# Altium PCB MIC17.PcbDoc
Units mil, origin at the board's own origin, x right, y up, seen from the top; angles counter-clockwise.
Board outline 3759.84 x 3838.58 mil, 2 copper layers (Top Layer, Bottom Layer); 46 components, 39 nets, 172 pads, 30 vias.
Unrouted connection lines stored in the file: 1.
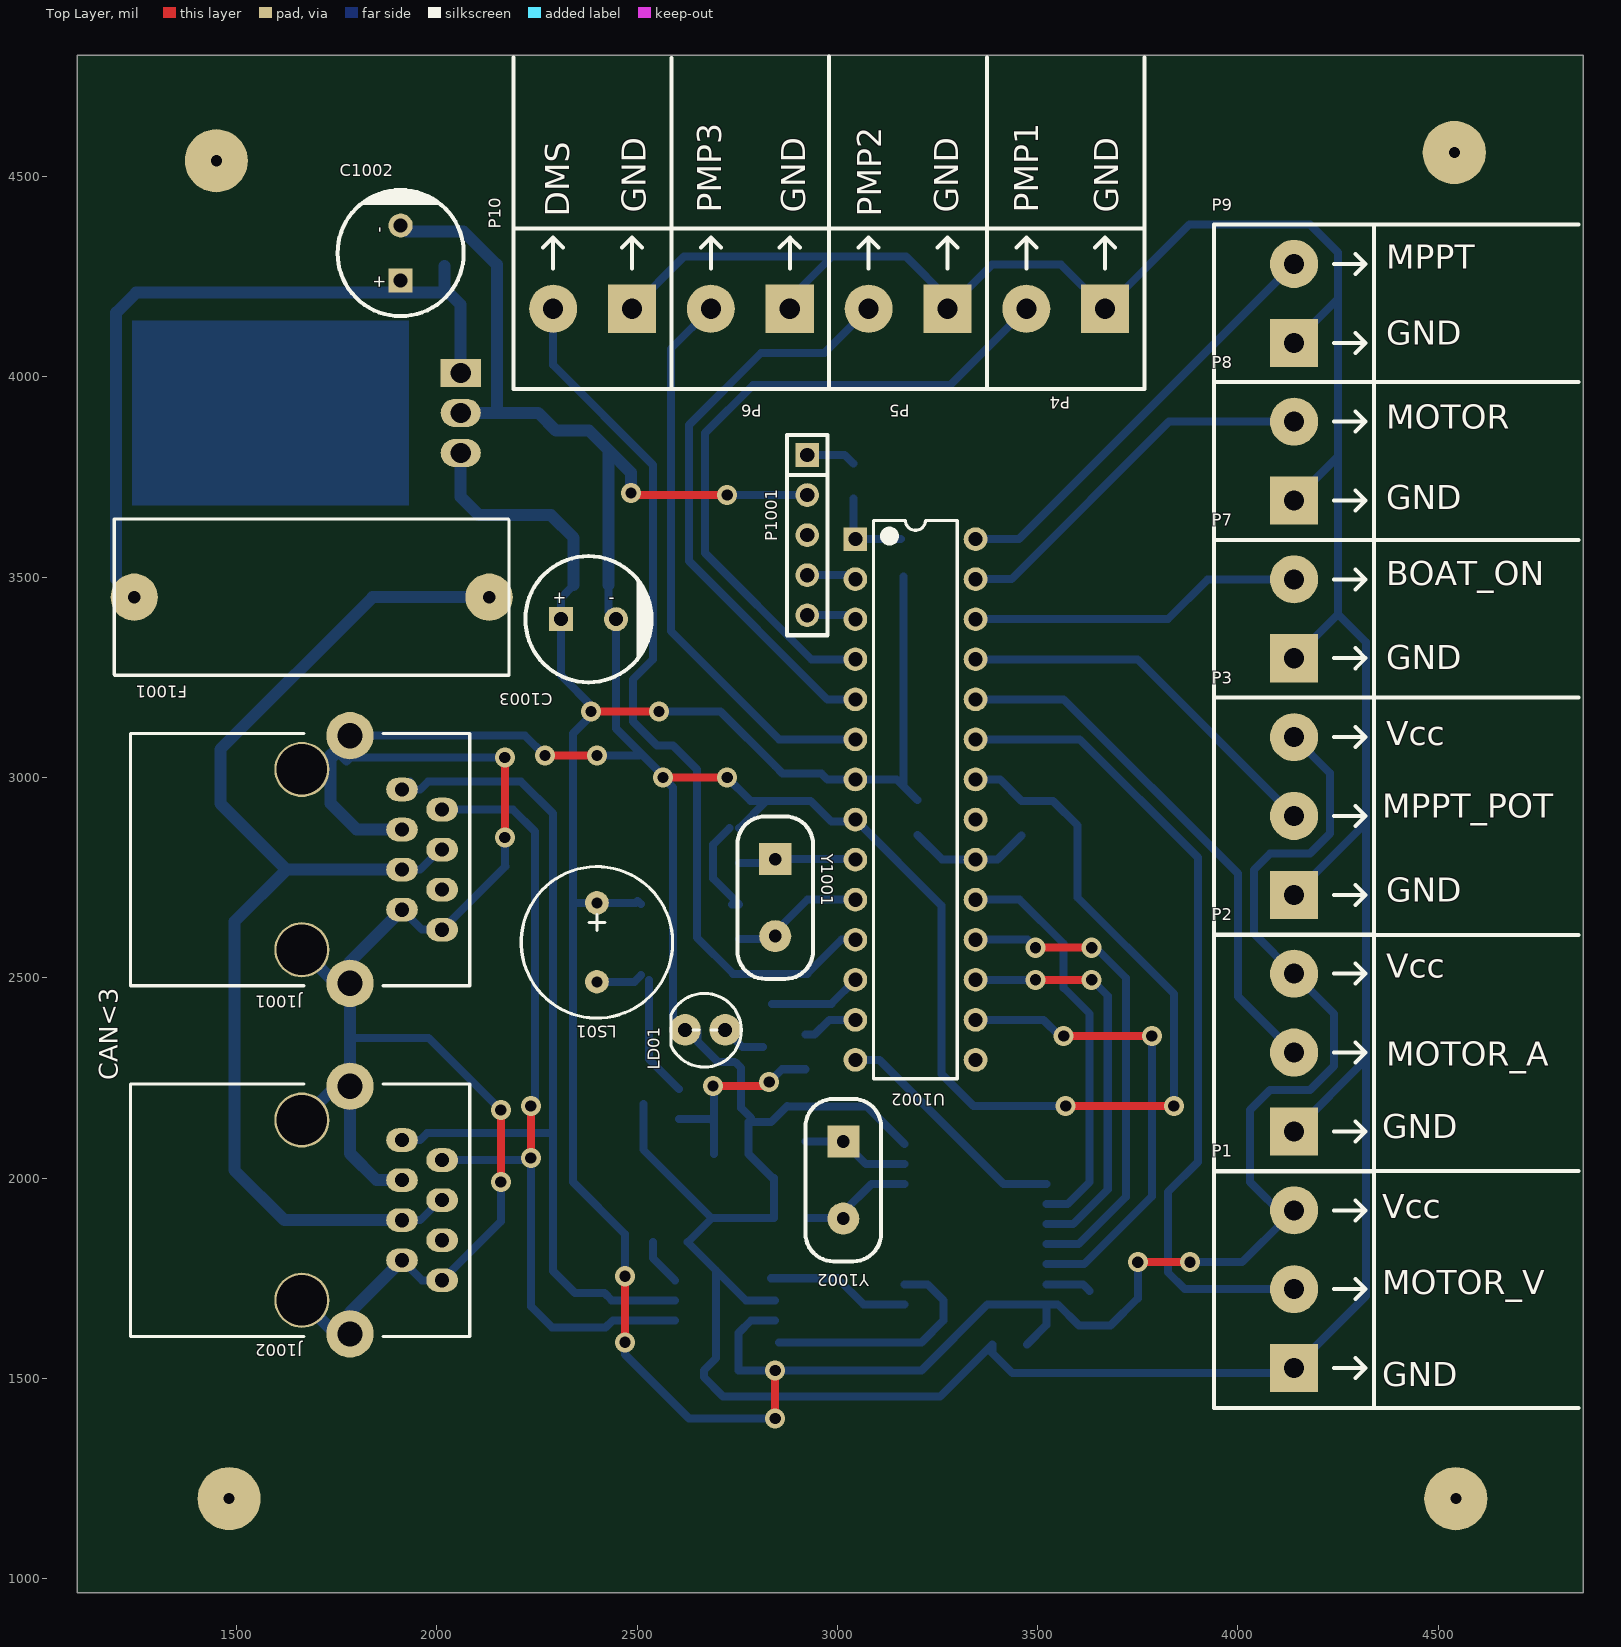
[diagram p0: Top Layer view]
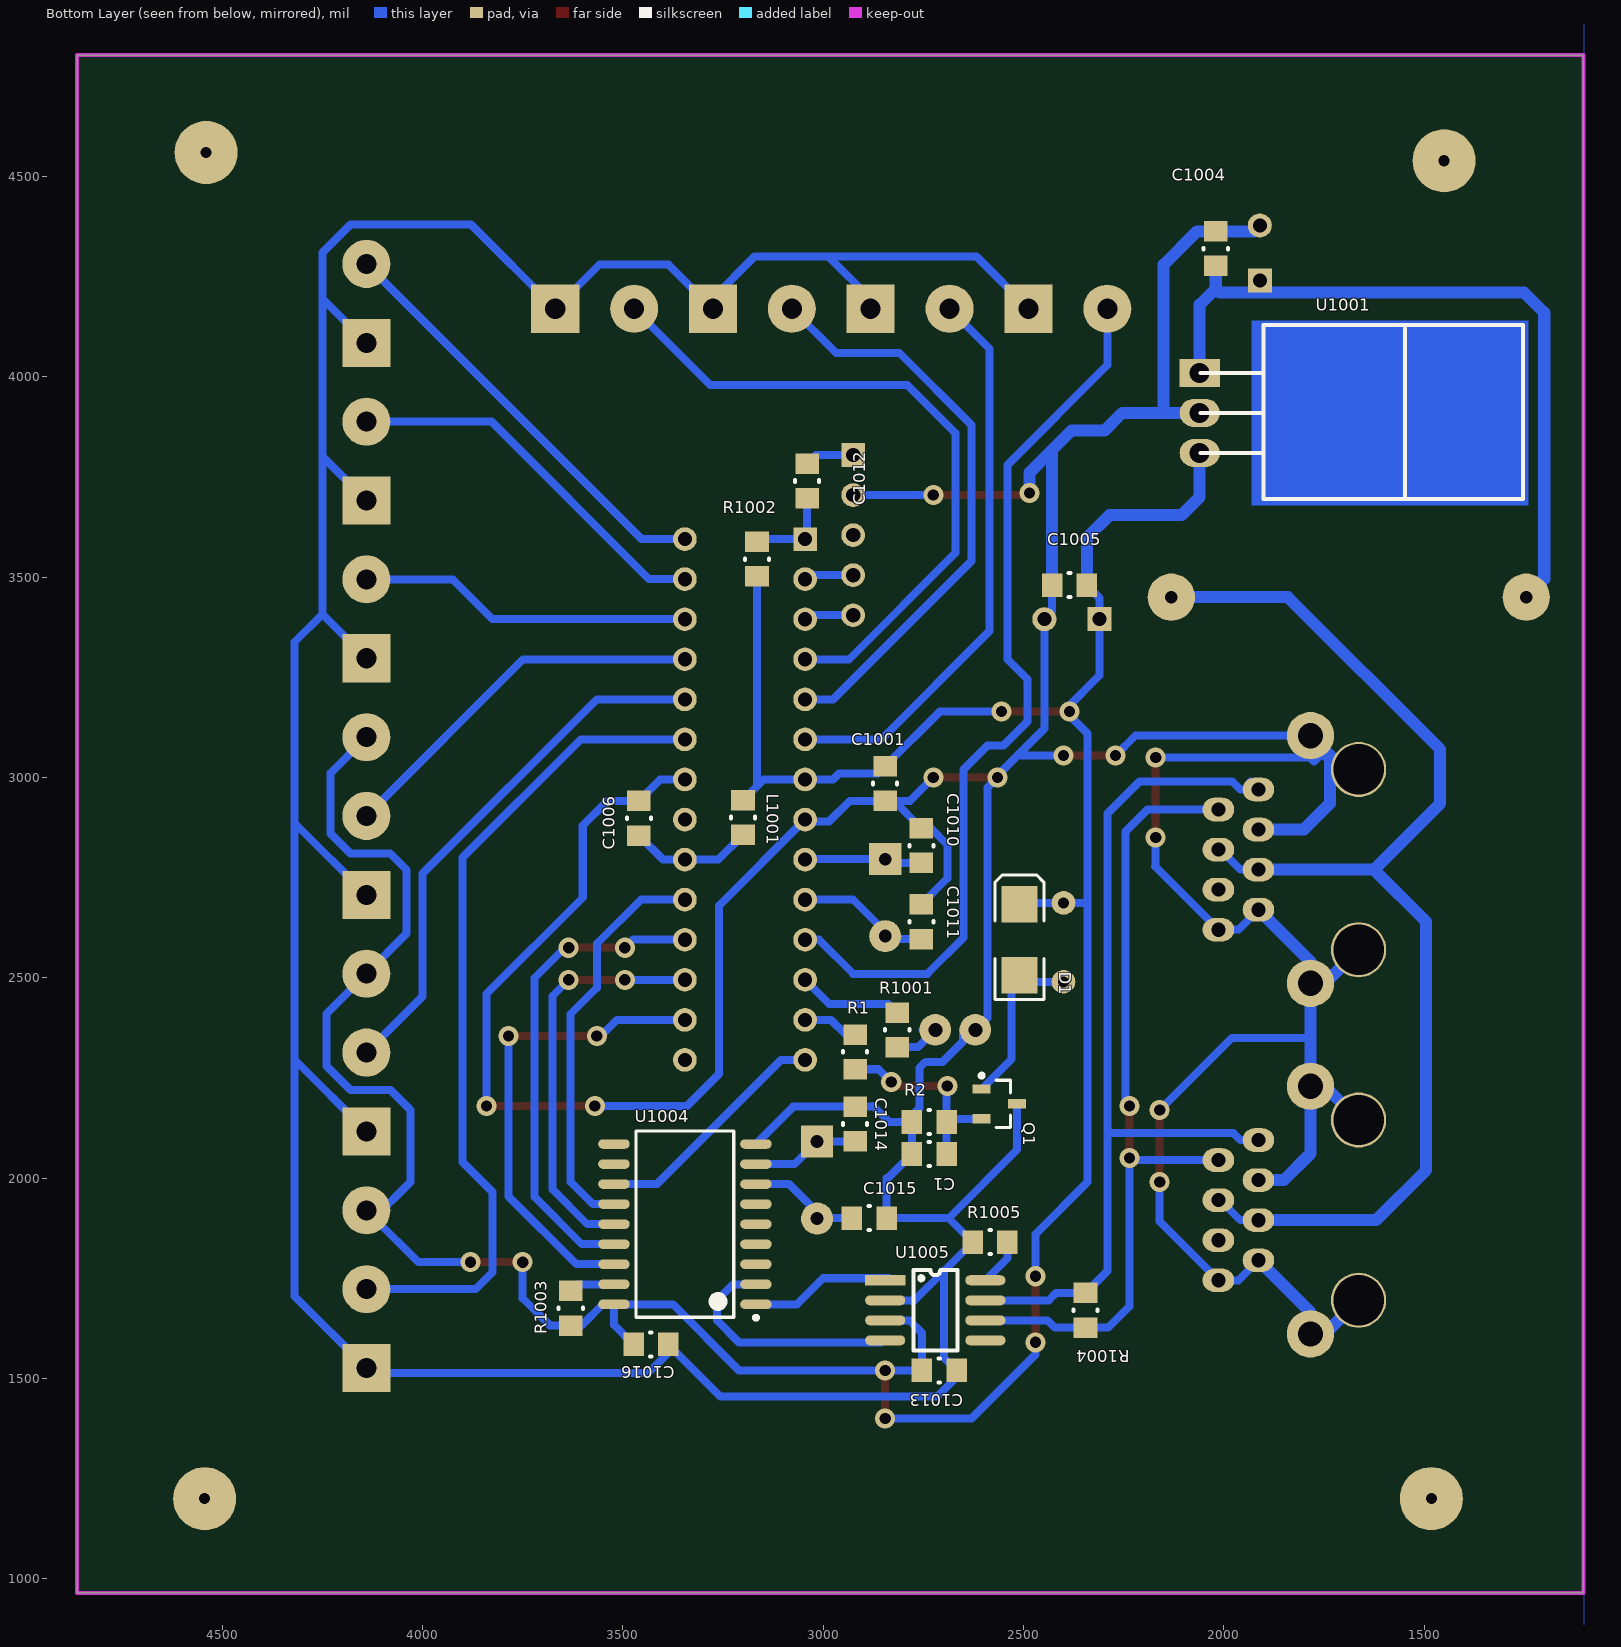
[diagram p1: Bottom Layer view, seen from below]
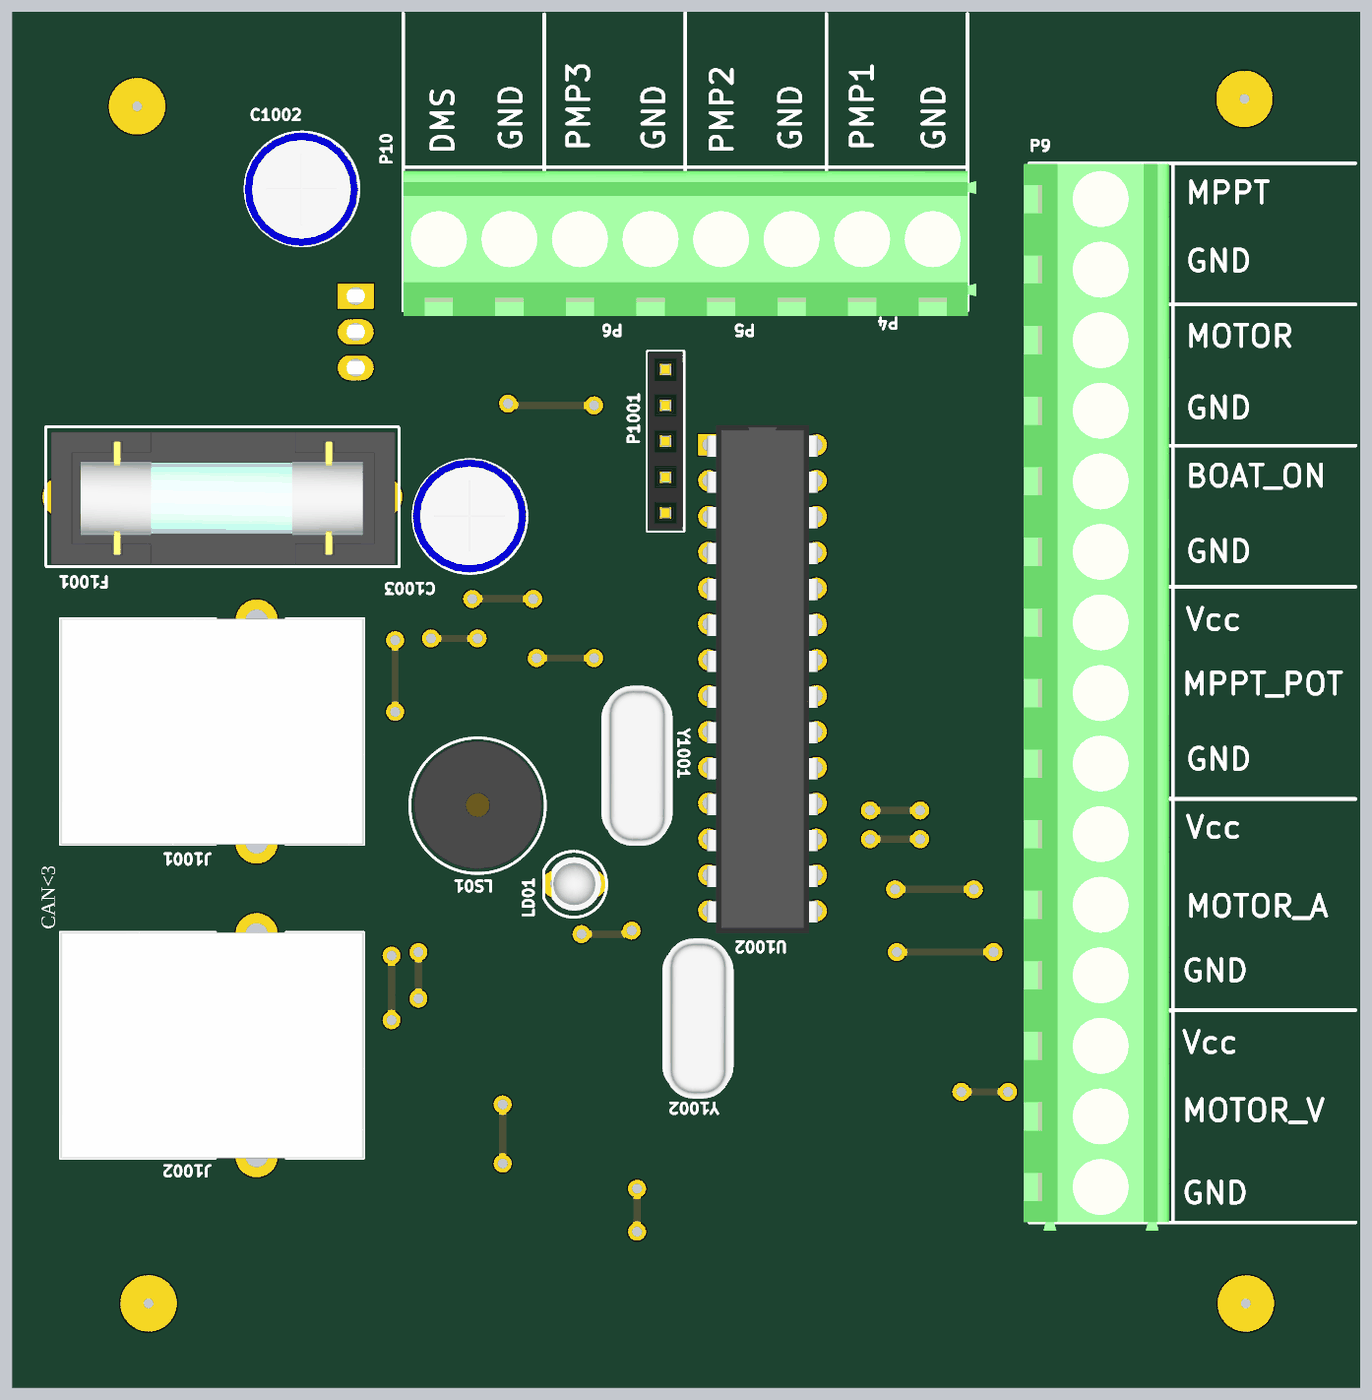
[diagram p2: 3D render of the assembled board from above, using the file's embedded part models]
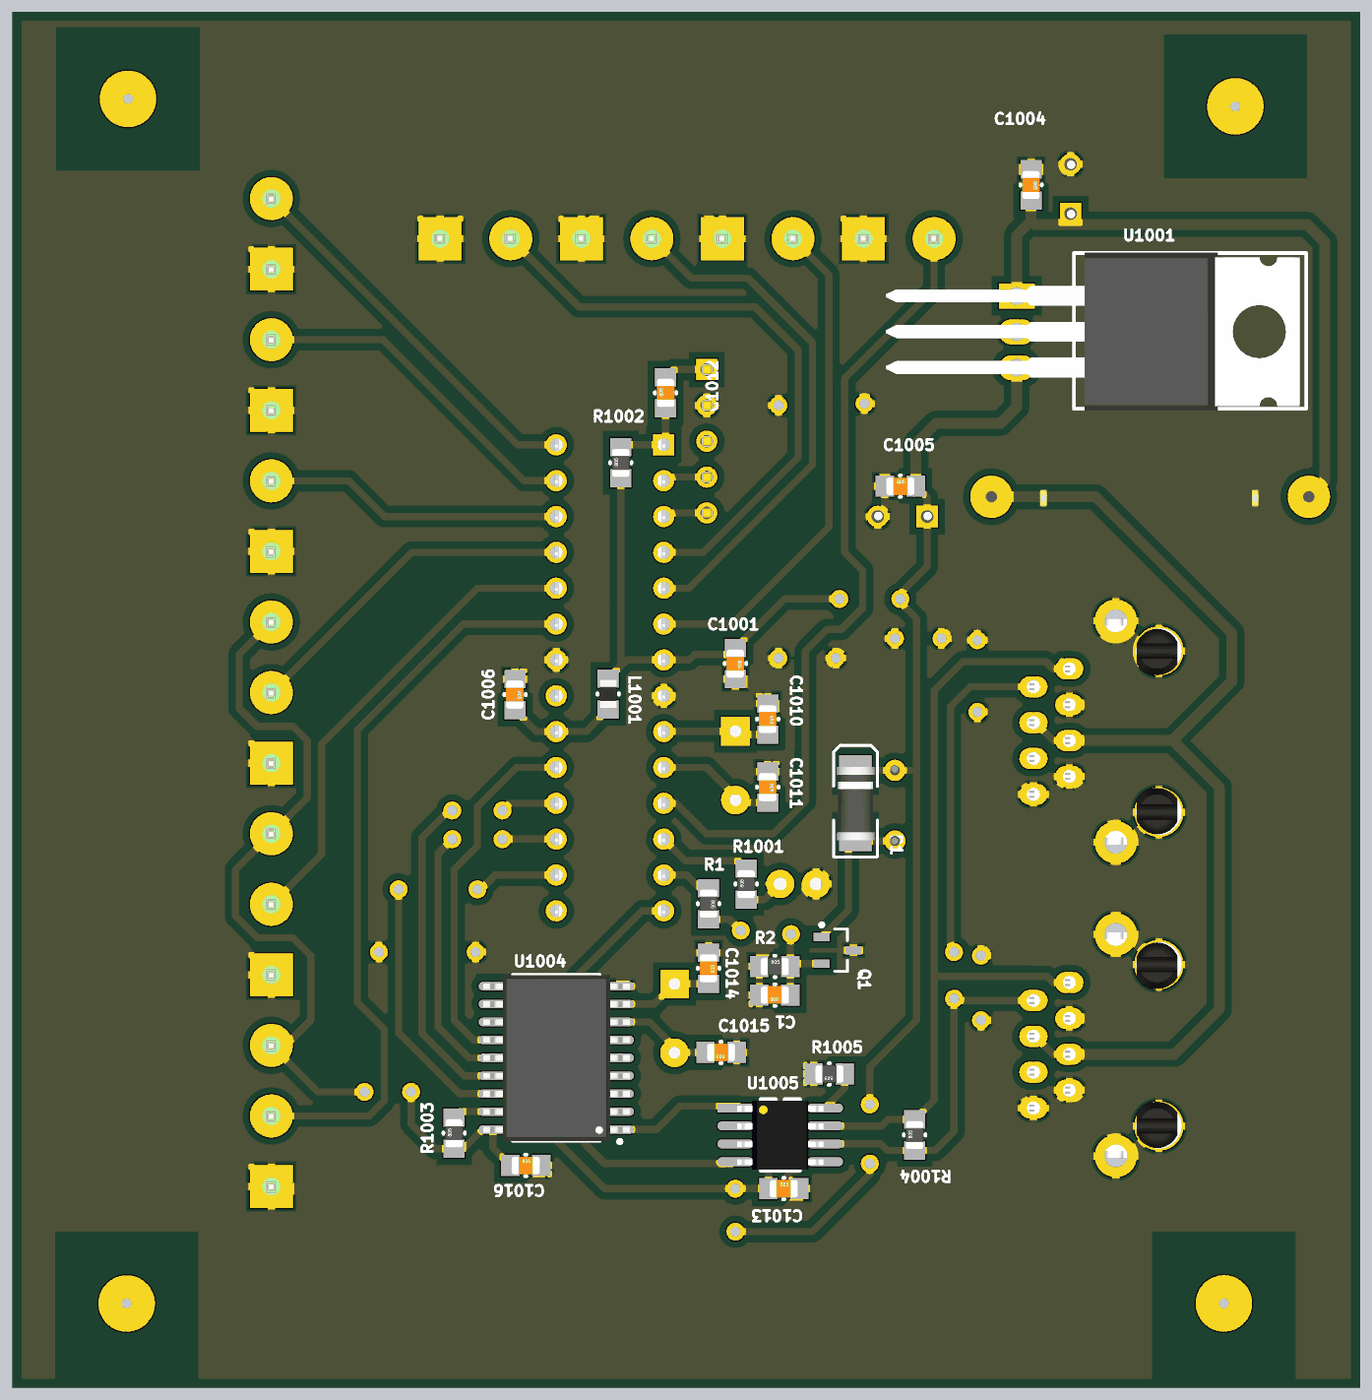
[diagram p3: 3D render of the assembled board from below, using the file's embedded part models]

## Layer stack, top to bottom
Top Layer: signal copper 1.4
Dielectric: dielectric 12.6, FR-4, Dk 4.8
Bottom Layer: signal copper 1.4

## Board outline
1102.36,964.57 4862.2,964.57 4862.2,4803.15 1102.36,4803.15

## Design rules (kind name [scope] priority, off if disabled: settings)
Clearance [All] p1: gap=20
PlaneClearance [All] p1: clearance=30
PlaneConnect [All] p1: planeconnectstyle=Relief reliefexpansion=20 reliefentries=4 reliefconductorwidth=20 reliefairgap=10
PolygonConnect [All] p1: connectstyle=Relief reliefconductorwidth=20 reliefentries=4 polygonreliefangle="90 Angle"
RoutingVias [All] p1: holewidth=28 width=50 viastyle="Through Hole" minholewidth=28 minwidth=50 maxholewidth=28 maxwidth=50
SilkscreenOverComponentPads [IsPad] p1: minsilkscreentomaskgap=10
SolderMaskExpansion [All] p1: expansion=4
Width [All] p1: maxlimit=30 minlimit=15 preferedwidth=20
25 further rules are at their usual default settings.

## Components (designator, comment, footprint, x,y, rotation, side; value= is the part's Value field where it differs from the comment)
C1 "100nF" 0805C 2735,2060 r180 bottom
C1001 "100nF" 0805C 2845,2985 r90 bottom
C1002 "CapacitorPol" CP3.5mm-8.0mm 1910,4240 r270 top
C1003 "CapacitorPol" CP3.5mm-8.0mm 2310,3395 r180 top
C1004 "100nF" 0805C 2020,4320 r90 bottom
C1005 "100nF" 0805C 2385,3480 r0 bottom
C1006 "100nF" 0805C 3460,2898.31 r90 bottom
C1010 "22pF" 0805C 2755,2830 r90 bottom
C1011 "22pF" 0805C 2755,2640 r90 bottom
C1012 "100nF" 0805C 3040,3740 r270 bottom
C1013 "100nF" 0805C 2710,1520 r0 bottom
C1014 "22pF" 0805C 2920,2135 r90 bottom
C1015 "22pF" 0805C 2885,1900 r180 bottom
C1016 "100nF" 0805C 3430,1585 r0 bottom
D1 "BYD77" DSO-C2/X2.3 2510,2595 r90 bottom
F1001 "250mA" "PORTA FUSIVEL" 1245,3450 r0 top
J1001 "RJ45 (canbus)" "ASSMANN A-2004-2-4-LP/FS" 1665,2795 r270 top
J1002 "RJ45 (canbus)" "ASSMANN A-2004-2-4-LP/FS" 1665,1920 r270 top
L1001 "?H" 0805L 3200,2900 r270 bottom
LD01 "GREEN" LED3MM 2720,2370 r180 top (schematic designator LD1001)
LS01 "Bell" Buzzer5V 2400,2490 r90 top (schematic designator LS?)
P1 "Motor Vel" KRE_3 4140,1525.94 r90 top
P2 "Motor Acel" KRE_3 4140,2116.5 r90 top
P3 "MPPT Pwr" KRE_3 4140,2707.05 r90 top
P4 "Pump 1" KRE_2 3668.66,4170 r180 top
P5 "Pump 2" KRE_2 3274.96,4170 r180 top
P6 "Pump 3" KRE_2 2881.26,4170 r180 top
P7 "Boat On" KRE_2 4140,3297.6 r90 top
P8 "M. On" KRE_2 4140,3691.3 r90 top
P9 "MPPT On" KRE_2 4140,4085 r90 top
P10 "DMS" KRE_2 2487.56,4170 r180 top
P1001 "USART" HDR1X5 2925,3805 r270 top
Q1 "BCV27" SOT95P240-3N 2560,2185 r180 bottom
R1 "100R" 0805R 2920,2315 r90 bottom
R2 "470" 0805R 2735,2140 r0 bottom
R1001 "470" 0805R 2815,2370 r270 bottom
R1002 "10k" 0805R 3165,3545 r270 bottom
R1003 "10k" 0805R 3630,1675 r270 bottom
R1004 "120" 0805R 2345,1670 r270 bottom
R1005 "10k" 0805R 2583.31,1840 r180 bottom
U1001 "LM7805" TO220_DEITADO 1902.52,3910 r270 bottom
U1002 "ATmega328P" DIP28-300(100) 3045,3595 r270 top
U1004 "MCP2515-E/SO" WSO18_L 3345,1885 r0 bottom
U1005 "MCP2551-I/SN" SOIC08-150(50) 2845,1745 r90 bottom
Y1001 "16MHz" HC49-US-THT 2845,2700 r270 top
Y1002 "16MHz" HC49-US-THT 3015,1995 r270 top

## Footprints (in the part's own frame and the unit in brackets; to place one, negate y for a bottom-side part, rotate by r counter-clockwise, add the part's x,y. Pads: shape width x height; smd on the part's side, far side on the other; paste and mask are expansions set on the pad)
0805C [mm] "Chip Capacitor; Body 2 x 1.3 mm (LxW typ)"
  rect 1.3x1.5 smd: 1(1.1,0) 2(-1.1,0)
  silkscreen extent -0.05,-0.76 0.05,0.76, body extent -1,-0.62 1,0.64, height 0.78
0805L [mm] "Chip Inductor; Body 2 x 1.3 mm (LxW typ)"
  rect 1.3x1.5 smd: 1(1.1,0) 2(-1.1,0)
  silkscreen extent -0.05,-0.76 0.05,0.76, body extent -1,-0.59 1,0.61, height 0.95
0805R [mm] "Chip Resistor; Body 2 x 1.3 mm (LxW typ)"
  rect 1.3x1.5 smd: 1(1.1,0) 2(-1.1,0)
  silkscreen extent -0.05,-0.76 0.05,0.76, body extent -0.99,-0.63 1.01,0.63, height 0.8
"ASSMANN A-2004-2-4-LP/FS" [mm]
  oval 1.5x2 hole 0.9: 1(-4.445,6.31) 2(-3.175,8.85) 3(-1.905,6.31) 4(-0.635,8.85) 5(0.635,6.31) 6(1.905,8.85) 7(3.175,6.31) 8(4.445,8.85)
  round 3 hole 1.6: S(-7.855,3.01) S(7.845,3.01)
  round 3.5 hole 3.2: S(-5.715,-0.04) S(5.715,-0.04)
  silkscreen extent -8,-10.9 8,10.6, body extent -8,-10.9 8,10.6, height 13.6
Buzzer5V [mm]
  round 1.5 hole 0.7: 1(0,0) 2(5,0)
  silkscreen extent -2.3,-4.8 7.3,4.8, body extent -2.01,-4.57 7.09,4.53, height 5.6
CP3.5mm-8.0mm [mil] "Capacitor, Electrolytic, Radial; Body 8 x 10.5 mm (Dia.xH typ); Pin Spacing 3.5 mm (typ)"
  rect 60x60 hole 35: 1(0,0)
  round 60 hole 35: 2(-137.8,0)
  silkscreen extent -226,-157 89,157, body extent -226,-160 91,157, height 468
DIP28-300(100) [mm] "DIP, 28-Leads, Row Spacing 7.62mm, Pitch 2.54mm, Body 34.67x7.3mm"
  rect 1.5x1.5 hole 0.9: 1(0,0)
  round 1.5 hole 0.9: 2(2.54,0) 3(5.08,0) 4(7.62,0) 5(10.16,0) 6(12.7,0) 7(15.24,0) 8(17.78,0) 9(20.32,0) 10(22.86,0) 11(25.4,0) 12(27.94,0) 13(30.48,0) 14(33.02,0) 15(33.02,7.62) 16(30.48,7.62) 17(27.94,7.62) 18(25.4,7.62) 19(22.86,7.62) 20(20.32,7.62) 21(17.78,7.62) 22(15.24,7.62) 23(12.7,7.62) 24(10.16,7.62) 25(7.62,7.62) 26(5.08,7.62) 27(2.54,7.62) 28(0,7.62)
  silkscreen extent -1.19,1.16 34.21,6.46, body extent -1.4,-0.13 34.6,7.74, height 5.08
DSO-C2/X2.3 [mm] "DO-214-AA/SMB; 2 C-Bend Leads; Body 5.3 x 3.6 mm, inc. leads (LxW)"
  rect 2.3x2.3 smd: 1(-2.25,0) 2(2.25,0)
  silkscreen extent -3.8,-1.55 4.1,1.55, body extent -2.62,-1.35 2.58,1.32, height 2.64
HC49-US-THT [mil] "THT Quartz Crystal"
  rect 80x80 hole 32: 1(-96.06,0)
  round 80 hole 32: 2(96.06,0)
  silkscreen extent -203,-94 203,94, body extent -223,-91 224,92, height 138
HDR1X5 [mm] "Connector; Header; 5 Position"
  rect 1.5x1.5 hole 0.9: 1(0,0)
  round 1.5 hole 0.9: 2(2.54,0) 3(5.08,0) 4(7.62,0) 5(10.16,0)
  silkscreen extent -1.27,-1.27 11.43,1.27, body extent -1.27,-1.27 11.43,1.23, height 8.4
KRE_2 [mil] "Terminal Block 2 pins"
  rect 120x120 hole 50: 1(0,0)
  round 120 hole 50: 2(196.85,0)
  silkscreen extent -98,-200 295,200, body extent -123,-190 294,216, height 559
KRE_3 [mil] "Terminal Block 3 pins"
  rect 120x120 hole 50: 1(0,0)
  round 120 hole 50: 2(196.85,0) 3(393.7,0)
  silkscreen extent -100,-200 492,200, body extent -123,-190 491,216, height 559
LED3MM [mm]
  round 2 hole 0.889: 1(0,0) 2(2.54,0)
  silkscreen extent -1.03,-2.31 3.43,2.36, body extent -0.63,-1.9 2.87,1.9, height 5.5
"PORTA FUSIVEL" [mm]
  round 3 hole 0.8: 1(0,0) 2(22.5,0)
  silkscreen extent -1.27,-4.95 23.77,4.95, body extent -0.9,-4.8 23.5,4.6, height 12.6
SOIC08-150(50) [mil] "SOIC; 8 Leads; Row Spacing 3.81 mm; Pitch 1.27 mm; 3D Antonio Fagaldo"
  rect 25x100 smd: 1(0,0)
  oval 25x100 smd: 2(-50,0) 3(-100,0) 4(-150,0) 5(-150,-250) 6(-100,-250) 7(-50,-250) 8(0,-250)
  silkscreen extent -175,-180 25,-70, body extent -173,-246 20,-4, height 69
SOT95P240-3N [mm] "SOT23, 3-Leads, Body 2.9x1.3mm, Pitch 0.95mm, Lead Span 2.4mm, IPC Medium Density"
  rect 1.15x0.6 smd: 1(-1.125,0.95) 2(-1.125,-0.95) 3(1.125,0)
  silkscreen extent -1.25,-1.5 0.7,1.92, body extent -0.7,-1.5 0.7,1.5, height 1.14
TO220_DEITADO [mil]
  rect 70x100 hole 50: 1(-100,-157.48)
  oval 70x100 hole 50: 2(0,-157.48) 3(100,-157.48)
  silkscreen extent -220,-155 214,650, body extent -221,-522 220,632, height 185
WSO18_L [mm] "18-Pin Small Outline Integrated Circuit 1.27 mm Pitch, IPC High Density"
  oval 2x0.6 smd: 1(-4.5,5.08) 2(-4.5,3.81) 3(-4.5,2.54) 4(-4.5,1.27) 5(-4.5,0) 6(-4.5,-1.27) 7(-4.5,-2.54) 8(-4.5,-3.81) 9(-4.5,-5.08) 10(4.5,-5.08) 11(4.5,-3.81) 12(4.5,-2.54) 13(4.5,-1.27) 14(4.5,0) 15(4.5,1.27) 16(4.5,2.54) 17(4.5,3.81) 18(4.5,5.08)
  silkscreen extent -4.62,-5.9 3.1,6.05, body extent -5.21,-5.87 5.19,5.88, height 2.82

## Part data
C1 C1001 C1004 C1005 C1006 C1010 C1011 C1012 C1013 C1014 C1015 C1016: library part Cap_0805, "Capacitor"
C1002 C1003: "Solid Aluminum Capacitor with Organic Semiconductor Electrolyte: 100uF, 10V, Bulk Pack"
D1: library part Diode, "Default Diode"
F1001: library part "Fuse 1", "Fuse"
J1001 J1002: library part "Modular Jack with Shield", "YH-59-01"
L1001: library part Ind_0805, "Inductor"
LD01: library part LED_0805, "LED"
LS01: "Electrical Bell"
P1 P2 P3: library part "Header 3", "Header, 3-Pin"
P4 P5 P6 P7 P8 P9 P10: library part KRE_2, "Terminal Block 1x2"
P1001: library part "Header 5", "Header, 5-Pin"
Q1: library part NPN1, "NPN Darlington Bipolar Transistor"
R1 R2 R1001 R1002 R1003 R1004 R1005: library part Res_0805, "Resistor"
U1001: library part µA7805CKC, "Positive-Voltage Regulator"
U1002: "8-bit AVR Microcontroller, 32KB Flash, 1KB EEPROM, 2KB SRAM, 28-pin PDIP, Industrial Grade (-40°C to 85°C)"
U1004: library part CMP-0186-00035-2, "Stand-Alone CAN Controller With SPI Interface, 18-Pin SOIC, Extended Temperature"
U1005: library part CMP-1721-00003-1, "High-Speed CAN Transceiver, / 1 Mb/s, 4.5 to 5.5 V, 8-Pin SOIC (SN), Industrial Temperature, RoHS, Tube"
Y1001 Y1002: library part Crystal, "Crystal"

## Free pads (board coordinates)
  round 157.48 hole 27.56: 0(1450,4539.37) 0(1481.89,1200) 0(4540,4560) 0(4543.7,1199.68)

## Via types
v1: diameter 50, hole 28, Top Layer to Bottom Layer, 30 vias

## Nets (pads, with @x,y where several pads share a name; then routed paths per layer and width w, separated by ;. In a path a pad name is that pad's centre, name@x,y a point inside that pad or via, vN(x,y) a via of type N, cw(c..) or ccw(c..) an arc to the next point about the centre after c; other vN are vias at no path point)
+5V: C1001.1 C1003.1 C1005.2 C1013.1 C1016.1 D1.2 L1001.2 LS01.2 P1.3 P2.3 P3.3 R1002.1 R1003.1 U1001.3 U1002.7 U1004.18 U1005.3 | length 8400.9
  Top Layer w20: v1(2385,3165) v1(2555,3165) ; v1(2470,1590) v1(2470,1755) ; v1(2845,1400) v1(2845,1520) ; v1(3750,1790) v1(3880,1790)
  Bottom Layer w20: C1005.2 2310,3448.31 C1003.1 2310,3255 2392.5,3172.5 2392.5,3167.5 2390,3165 v1(2385,3165) 2385,3155 2340,3110 2340,1990 2470,1860 v1(2470,1755) ; 2346.85,2686.85 LS01.2 ; LS01.2@2415,2686.85 2496.73,2686.85 2501.73,2691.85 D1.2 ; v1(2470,1590) 2470,1560 2630,1400 v1(2845,1400) ; v1(2555,3165) 2708.31,3165 C1001.1 2863.31,3010 2960,3010 2975,2995 U1002.7 3148.31,2995 L1001.2 3165,2978.31 R1002.1 ; U1005.3 2785,1645 2753.31,1613.31 C1013.1 v1(2845,1520) 3210,1520 3375,1685 U1004.18 ; C1016.1 3522.17,1633.86 U1004.18 ; v1(3750,1790) 3750,1700 3681.69,1631.69 R1003.1 3603.31,1631.69 3550,1685 U1004.18 ; v1(3880,1790) 4010.35,1790 P1.3@4120.35,1900 ; P1.3 P1.3@4120.35,1900 ; P3.3 4230,3010.75 4230,2860 4180,2810 4080.53,2810 4040,2769.47 4040,2610.2 P2.3 4240,2410.2 4240,2280 4180,2220 4080,2220 4030,2170 4030,1990.35 P1.3@4120.35,1900
  Bottom Layer w30: U1001.3 2060,3700 2105,3655 2285,3655 2341.69,3598.31 C1005.2
+5V_ADC: C1006.2 L1001.1 U1002.20 | length 310.4
  Bottom Layer w20: L1001.1 3261.69,2795 U1002.20 3400,2795 C1006.2
+18V: C1002.1 C1004.2 F1001.1 U1001.1 | length 1842.6
  Bottom Layer w30: F1001.1 1200,3495 1200,4160 1250,4210 2010,4210 ; C1004.2 2020,4220 2060,4180 U1001.1
+18V_PRE: F1001.2 J1001.4 J1001.5 J1002.4 J1002.5 | length 2999.6
  Bottom Layer w20: J1002.5 1958.79,1895 2008.79,1945 J1002.4 ; J1001.5 1958.79,2770 2008.79,2820 J1001.4
  Bottom Layer w30: J1002.5 1620,1895 1495,2020 1495,2640 1625,2770 ; J1001.5 1625,2770 ; F1001.2@2130,3450 1840,3450 1460,3070 1460,2935 1625,2770
BOAT_ON: P7.2 U1002.26 | length 836.2
  Bottom Layer w20: U1002.26 3825,3395 3924.45,3494.45 P7.2
BUZZER: R1.1 U1002.13 | length 140.2
  Bottom Layer w20: R1.1 2943.31,2358.31 2980,2395 U1002.13
CAN_GND: C1.2 C1001.2 C1002.2 C1003.2 C1004.1 C1005.1 C1006.1 C1010.1 C1011.1 C1013.2 C1014.1 C1015.1 C1016.2 J1001.3 J1001.7 J1001.8 J1001.S J1002.3 J1002.7 J1002.8 J1002.S LD01.2 P1.1 P2.1 P3.1 P4.1 P5.1 P6.1 P7.1 P8.1 P9.1 P10.1 P1001.2 Q1.3 R2.1 R1005.2 U1001.2 U1002.8 U1002.22 U1004.9 U1005.2 | length 21191.4
  Top Layer w20: v1(2160,1990) v1(2160,2170) ; v1(2170,2850) v1(2170,3050) ; v1(2270,3055) v1(2400,3055) ; v1(2485,3710) 2490,3705 v1(2725,3705) ; v1(2565,3000) v1(2725,3000) ; v1(3570,2180) v1(3840,2180)
  Bottom Layer w20: 1735.11,3040 1755.11,3060 1775.11,3040 1785.11,3050 v1(2170,3050) ; 1783.5,2350 1980,2350 v1(2160,2170) ; J1001.S@1783.5,3104.25 2220.75,3104.25 v1(2270,3055) ; J1002.7 1963.43,1745 J1002.8 2160,1891.57 v1(2160,1990) ; J1001.7 1963.43,2620 J1001.8 2171.71,2778.29 2170,2780 v1(2170,2850) ; v1(2400,3055) 2505,3055 2510,3060 ; C1005.1 2428.31,3414.49 C1003.2 2447.8,3122.2 2510,3060 ; P10.1 2617.56,4300 2981.26,4300 ; Q1.3 2515.71,2070.91 2686.61,1900 ; v1(2725,3000) 2783.31,2941.69 C1001.2@2823.39,2941.69 ; v1(2725,3705) P1001.2 ; C1010.1@2731.02,2873.31 2690,2832.28 2690,2748.31 C1011.1 C1011.1@2736.69,2683.31 ; C1010.1 C1001.2@2823.39,2941.69 ; R2.1@2785,2150 2760,2175 2760,2275 2748.31,2286.69 2746.74,2286.69 2743.43,2290 2701.9,2290 2650.63,2341.27 2650.63,2370 LD01.2 2590,2400 2590,2975 v1(2565,3000) 2565,3005 2510,3060 ; U1005.2 2771.61,1695 2697.72,1768.9 ; P6.1 2881.26,4195 2983.76,4297.5 2981.26,4300 ; U1004.9 3075,2177.83 3075,2178.31 C1014.1 2876.69,2178.31 2875,2180 2835,2140 R2.1 C1.2 2838.31,2000 2841.69,2000 C1015.1 2686.61,1900 ; U1002.22 3406.61,2995 C1006.1 3538.39,2941.61 3600,2880 3600,2700 3840,2460 v1(3840,2180) ; v1(3570,2180) 3340,2180 3260,2260 3260,2680 U1002.8 3040,2890 2985,2890 2933.31,2941.69 C1001.2 C1001.2@2823.39,2941.69 ; P2.1 4320,2296.5 ; P3.1 4320,2887.05 ; P7.1 4250,3407.6 ; P8.1 4250,3801.3 ; P9.1 4250,4195 ; 2686.61,1900 R1005.2 2697.72,1768.9 ; 2697.72,1768.9 2697.72,1551.02 C1013.2 2666.69,1503.31 2715,1455 3256.69,1455 C1016.2 3386.69,1563.31 3436.69,1513.31 4127.36,1513.31 P1.1 4320,1705.94 4320,2296.5 ; 2981.26,4300 3171.26,4300 3274.96,4196.3 P5.1 3276.26,4170 3386.26,4280 3558.66,4280 P4.1 3878.66,4380 4180,4380 4250,4310 4250,4195 ; 4250,3407.6 4250,3801.3 ; 4250,3407.6 4320,3337.6 4320,2887.05 ; 4250,3801.3 4250,4195 ; 4320,2296.5 4320,2887.05
  Bottom Layer w30: J1002.S@1663.43,1695 1747.28,1611.14 1783.5,1611.14 1783.5,1665.08 J1002.7 ; J1002.S@1663.43,2145 1747.68,2229.25 J1002.S@1783.5,2229.25 ; J1001.S@1663.43,2570 1747.28,2486.14 J1001.S@1783.5,2486.14 ; J1001.S@1783.5,3104.25 1735.11,3055.86 1735.11,3040 1735.11,2934.89 1800,2870 J1001.3 ; C1002.2 1924.49,4363.31 C1004.1 2066.69,4363.31 2150,4280 2150,3910 ; J1002.3 1850,1995 1783.5,2061.5 J1002.S@1783.5,2229.25 ; J1001.7 1783.5,2540.08 J1001.S@1783.5,2486.14 ; U1001.2 2150,3910 ; C1005.1 2428.31,3817.72 ; v1(2485,3710) 2485,3761.02 2428.31,3817.72 ; J1002.S@1783.5,2229.25 1783.5,2350 J1001.S@1783.5,2486.14 ; 2150,3910 2253.27,3910 2297.76,3865.51 2380.51,3865.51 2428.31,3817.72
CAN_H: J1001.1 J1002.1 R1004.2 U1005.7 | length 2307
  Bottom Layer w20: J1002.1 1958.79,2095 1975.82,2112.03 2024.53,2112.03 ; J1001.1@1933.43,2990 J1001.1 1958.79,2970 1978.79,2990 2210,2990 2290,2910 2290,1768.31 R1004.2 2418.48,1713.31 2436.79,1695 U1005.7 ; 2024.53,2112.5 2290,2112.5
CAN_L: J1001.2 J1002.2 R1004.1 U1005.6 | length 2055.6
  Top Layer w20: v1(2235,2050) v1(2235,2180)
  Bottom Layer w20: J1002.2 v1@2230,2045 ; J1001.2 2190,2920 2245,2865 2245,2180 v1(2235,2180) ; v1(2235,2050) 2235,1680 2288.31,1626.69 R1004.1 2421.69,1626.69 2440,1645 U1005.6
DMS: P10.2 U1002.11 | length 2251.2
  Bottom Layer w20: P10.2 2290.71,4029.29 2540,3780 2540,3295 2490,3245 2490,3140 2550,3080 2590,3080 2650,3020 2650,2600 2740,2510 2925,2510 3010,2595 U1002.11
LED: R1001.2 U1002.12 | length 233.2
  Bottom Layer w20: R1001.2@2836.69,2435 2985,2435 U1002.12
MCP2515_INT: U1002.14 U1004.12 | length 605.6
  Bottom Layer w20: U1002.14 3105,2295 3415,1985 U1004.12
MCP2515_MISO: U1002.18 U1004.15 | length 1208.2
  Top Layer w20: v1(3495,2575) v1(3635,2575)
  Bottom Layer w20: U1002.18 3475,2595 v1(3495,2575) ; U1004.15 3602.28,1835 3720,1952.72 3720,2500 3645,2575 v1(3635,2575)
MCP2515_MOSI: U1002.17 U1004.14 | length 1028.8
  Top Layer w20: v1(3495,2495) v1(3635,2495) v1@3645,2495
  Bottom Layer w20: U1002.17 v1(3495,2495) ; U1004.14 3588.64,1885 3675,1971.36 3675,2455 v1(3635,2495)
MCP2515_SCK: U1002.19 U1004.13 | length 1018.1
  Bottom Layer w20: U1002.19 3455,2695 3565,2585 3565,2475 3630,2410 3630,1990 3575,1935 U1004.13
MCP2515_SS: U1002.16 U1004.16 | length 1190.4
  Top Layer w20: v1(3565,2355) v1(3785,2355)
  Bottom Layer w20: U1002.16 3515,2395 3555,2355 v1(3565,2355) ; U1004.16 3615.92,1785 3785,1954.08 v1(3785,2355)
MOTOR_ACEL: P2.2 U1002.24 | length 1339.8
  Bottom Layer w20: U1002.24 3565,3195 4000,2760 4000,2453.35 P2.2
MOTOR_ON: P8.2 U1002.27 | length 957.8
  Bottom Layer w20: U1002.27 3435,3495 3828.15,3888.15 P8.2
MOTOR_VEL: P1.2 U1002.23 | length 2075.7
  Bottom Layer w20: U1002.23 3605,3095 3900,2800 3900,2040 3825,1965 3825,1765 3867.2,1722.8 P1.2
MPPT_ON: P9.2 U1002.28 | length 1079.5
  Bottom Layer w20: U1002.28 3453.15,3595 P9.2
MPPT_POT: P3.2 U1002.25 | length 957
  Bottom Layer w20: U1002.25 3748.9,3295 P3.2
NetC1_1: C1.1 Q1.2 R1.2 R2.2 | length 508.5
  Top Layer w20: v1(2690,2230) 2820,2230 v1(2830,2240)
  Bottom Layer w20: Q1.2 2684.09,2147.6 R2.2 ; v1(2690,2230) 2691.69,2228.31 R2.2 ; C1.1 R2.2 ; v1(2830,2240) 2861.69,2271.69 R1.2
NetC1012_1: C1012.1 R1002.2 U1002.1 | length 217.1
  Bottom Layer w20: C1012.1 3040,3600 U1002.1 R1002.2@3158.31,3595
NetC1014_2: C1014.2 U1004.8 Y1002.1 | length 271.3
  Bottom Layer w20: C1014.2 3014.37,2091.69 Y1002.1 3071.06,2035 U1004.8
NetC1015_2: C1015.2 U1004.7 Y1002.2 | length 285
  Bottom Layer w20: C1015.2 3013.94,1900 Y1002.2 3015,1915 3085,1985 U1004.7
NetD1_1: D1.1 LS01.1 Q1.1 | length 405.2
  Bottom Layer w20: LS01.1@2415,2490 2493.58,2490 D1.1 ; D1.1@2530,2495 2530,2296.69 Q1.1
NetLD1001_1: LD01.1 R1001.1 | length 144.6
  Bottom Layer w20: LD01.1@2751.69,2370 LD01.1 2763.31,2326.69 R1001.1
NetR1003_2: R1003.2 U1004.17 | length 114.7
  Bottom Layer w20: U1004.17 3613.31,1735 R1003.2
NetR1005_1: R1005.1 U1005.8 | length 117.8
  Bottom Layer w20: R1005.1 2540,1800 U1005.8
PUMP1_ON: P4.2 U1002.4 | length 1715
  Bottom Layer w20: U1002.4 2935,3295 2670,3560 2670,3860 2790,3980 3281.81,3980 P4.2
PUMP2_ON: P5.2 U1002.5 | length 1466.1
  Bottom Layer w20: U1002.5 2975,3195 2630,3540 2630,3880 2810,4060 2968.11,4060 P5.2
PUMP3_ON: P6.2 U1002.6 | length 1418.5
  Bottom Layer w20: P6.2 2584.41,4070 2584.41,3365.59 2855,3095 U1002.6
RXCAN: U1004.2 U1005.4 | length 596.5
  Bottom Layer w20: U1005.4@2855,1590 3210,1590 3265,1645 3265,1695 3225,1735 U1004.2
TXCAN: U1004.1 U1005.1 | length 359.8
  Bottom Layer w20: U1005.1@2835,1750 2845,1750 3000,1750 3065,1685 U1004.1
USART_RTS: C1012.2 P1001.1 | length 124
  Bottom Layer w20: P1001.1 3018.31,3805 C1012.2
USART_RX: P1001.4 U1002.2 | length 124.1
  Bottom Layer w20: P1001.4 3035,3505 U1002.2
USART_TX: P1001.5 U1002.3 | length 124.1
  Bottom Layer w20: P1001.5 3035,3405 U1002.3
XTAL1: C1010.2 U1002.9 Y1001.1 | length 292.8
  Bottom Layer w20: C1010.2 2835.63,2786.69 Y1001.1 U1002.9@3043.94,2796.06
XTAL2: C1011.2 U1002.10 Y1001.2 | length 326.1
  Bottom Layer w20: C1011.2 2837.76,2596.69 Y1001.2 ; Y1001.2@2845,2615 2925,2695 U1002.10
pads on no net: J1001.6 J1002.6 P1001.3 U1002.15 U1002.21 U1004.3 U1004.4 U1004.5 U1004.6 U1004.10 U1004.11 U1005.5

## Polygon pours and split planes (outlines as drawn)
CAN_GND on Bottom Layer "CAN_GND_L02_P002" (solid, remove dead copper, shelved, pour order 2): 1100,4900 5600,4900 5600,800 1100,800

## Keep-outs
Bottom Layer:
  lines w10: 1102.36,964.57 1102.36,4803.15 4600,4803.15 4862.2,4803.15 4862.2,964.57 1102.36,964.57

## Other copper
Bottom Layer:
  pour cut-out: 1250,4739.37 1650,4739.37 1650,4339.37 1250,4339.37
  pour cut-out: 1681.89,1400 1281.89,1400 1281.89,1000 1681.89,1000
  pour cut-out: 4743.7,1399.68 4343.7,1399.68 4343.7,999.68 4743.7,999.68
  pour cut-out: 4340,4760 4740,4760 4740,4360 4340,4360
  pour cut-out: 3570,2120 3430,2120 3430,1650 3557.17,1650 3560,1647.17
  pour cut-out: 3120,2050 3120,2070 3200,2070 3250,2050 3250,1650 3120,1650
  pour cut-out: 2750,1770 2910,1770 2910,1570 2750,1570
  pour cut-out: 2530,1770 2690,1770 2690,1570 2530,1570
  region net CAN_GND: 1240,3680 1240,4140 1930,4140 1930,3680

## Silkscreen, mask and mechanical layers (free items; w line width, h text height)
Top Overlay:
  lines w10: 2192.28,4370 2192.28,4797.72 ; 2585.98,4370 2585.98,4795.98 ; 2979.69,4370 2979.69,4799.69 ; 3373.39,4370 3373.39,4796.61 ; 3767.09,4370 3767.09,4797.09 ; 4340,1425.94 4849.72,1425.94 ; 4340,2018.07 4849.72,2018.07 ; 4340,2607.05 4849.72,2607.05 ; 4340,3199.17 4849.72,3199.17 ; 4340,3592.87 4849.72,3592.87 ; 4340,3986.57 4849.72,3986.57 ; 4340,4380.28 4849.72,4380.28
  text "GND" at 2521.26,4410 h60 r90
  text "PMP3" at 2710,4410 h60 r90
  text "GND" at 2920,4410 h60 r90
  text "GND" at 3301.26,4410 h60 r90
  text "PMP1" at 3501.26,4410 h60 r90
  text "GND" at 3701.26,4410 h60 r90
  text "DMS" at 2331.26,4400 h60 r90
  text "PMP2" at 3110,4400 h60 r90
  text "MPPT" at 4370,4270 h60
  text "GND" at 4370,4080 h60
  text "MOTOR" at 4370,3870 h60
  text "GND" at 4370,3670 h60
  text "BOAT_ON" at 4370,3480 h60
  text "GND" at 4370,3270 h60
  text "Vcc" at 4370,3080 h60
  text "MPPT_POT" at 4360,2900 h60
  text "GND" at 4370,2690 h60
  text "Vcc" at 4370,2500 h60
  text "MOTOR_A" at 4370,2280 h60
  text "CAN<3" at 1220.47,2244.09 h80 r90
  text "GND" at 4360,2100 h60
  text "Vcc" at 4360,1900 h60
  text "MOTOR_V" at 4360,1710 h60
  text "GND" at 4360,1480 h60

## Text inside footprints (layer, text, board x,y; h text height)
C1002: Top Overlay "-" at 1870,4360 h30 r90; Top Overlay "+" at 1870,4220 h30 r90
C1003: Top Overlay "-" at 2430,3435 h30; Top Overlay "+" at 2290,3435 h30